# Altium PCB PCB1.PcbDoc
Units mm, origin at the board's own origin, x right, y up, seen from the top; angles counter-clockwise.
Board outline 30 x 50 mm, 2 copper layers (Top Layer, Bottom Layer); 27 components, 43 nets, 126 pads, 106 vias.
Unrouted connection lines stored in the file: 2.
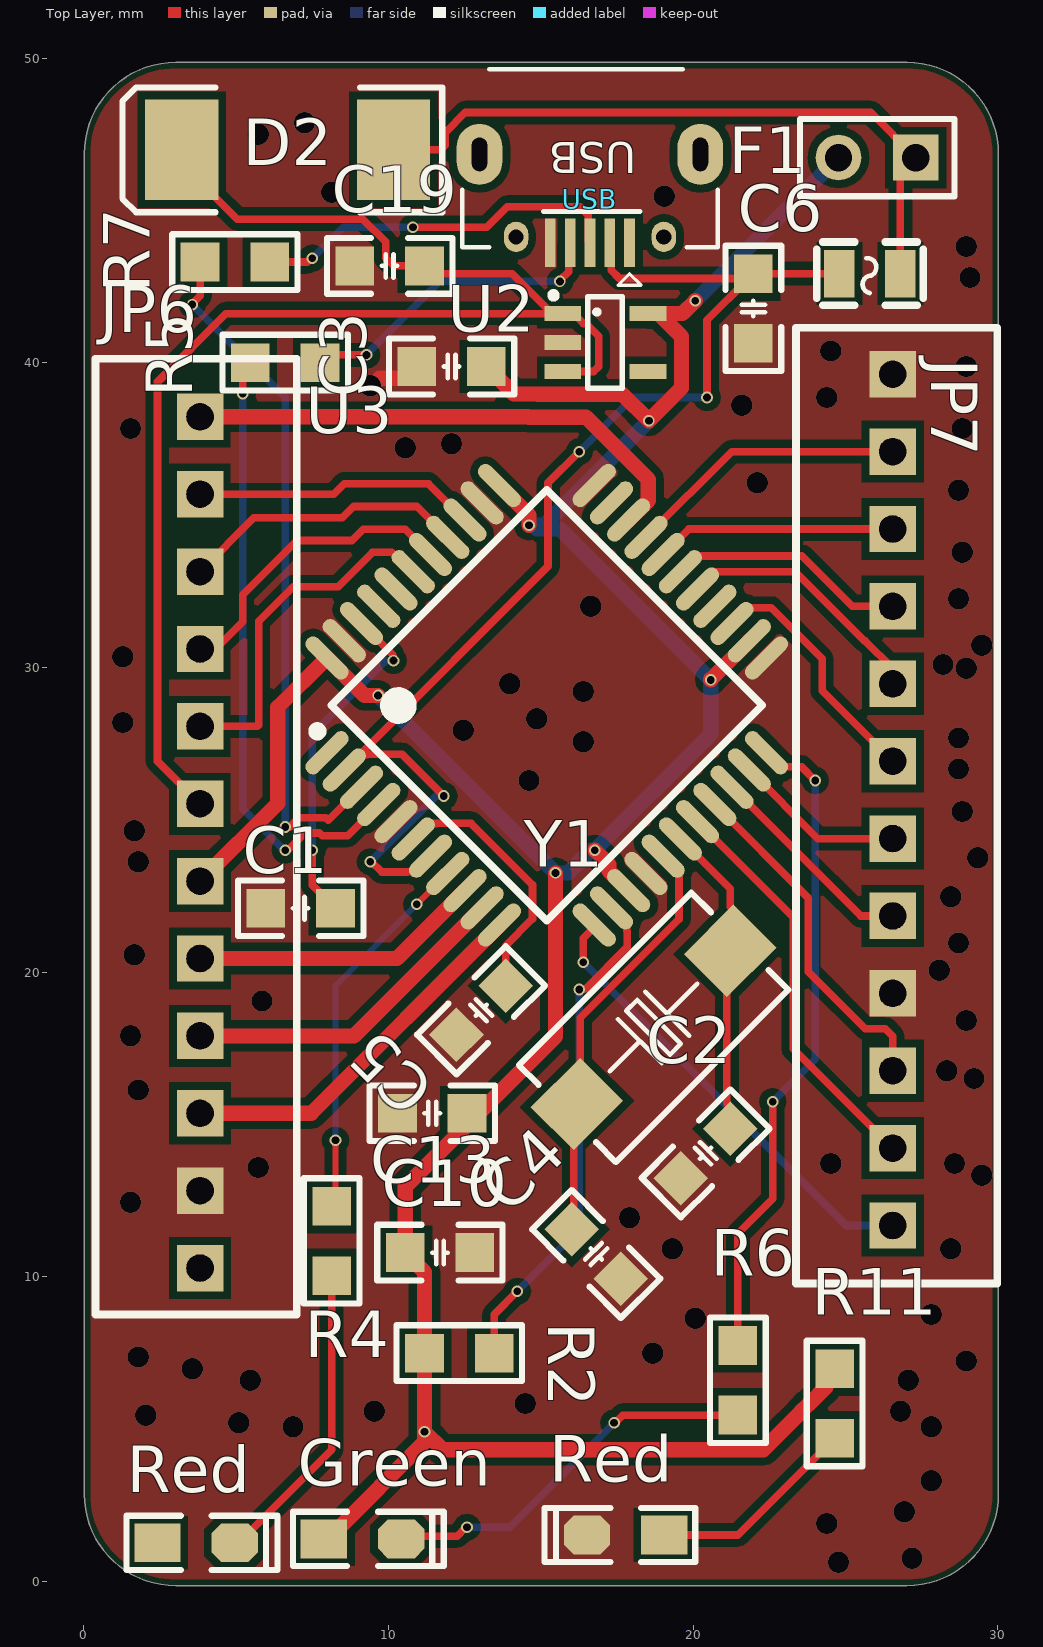
[diagram p0: Top Layer view]
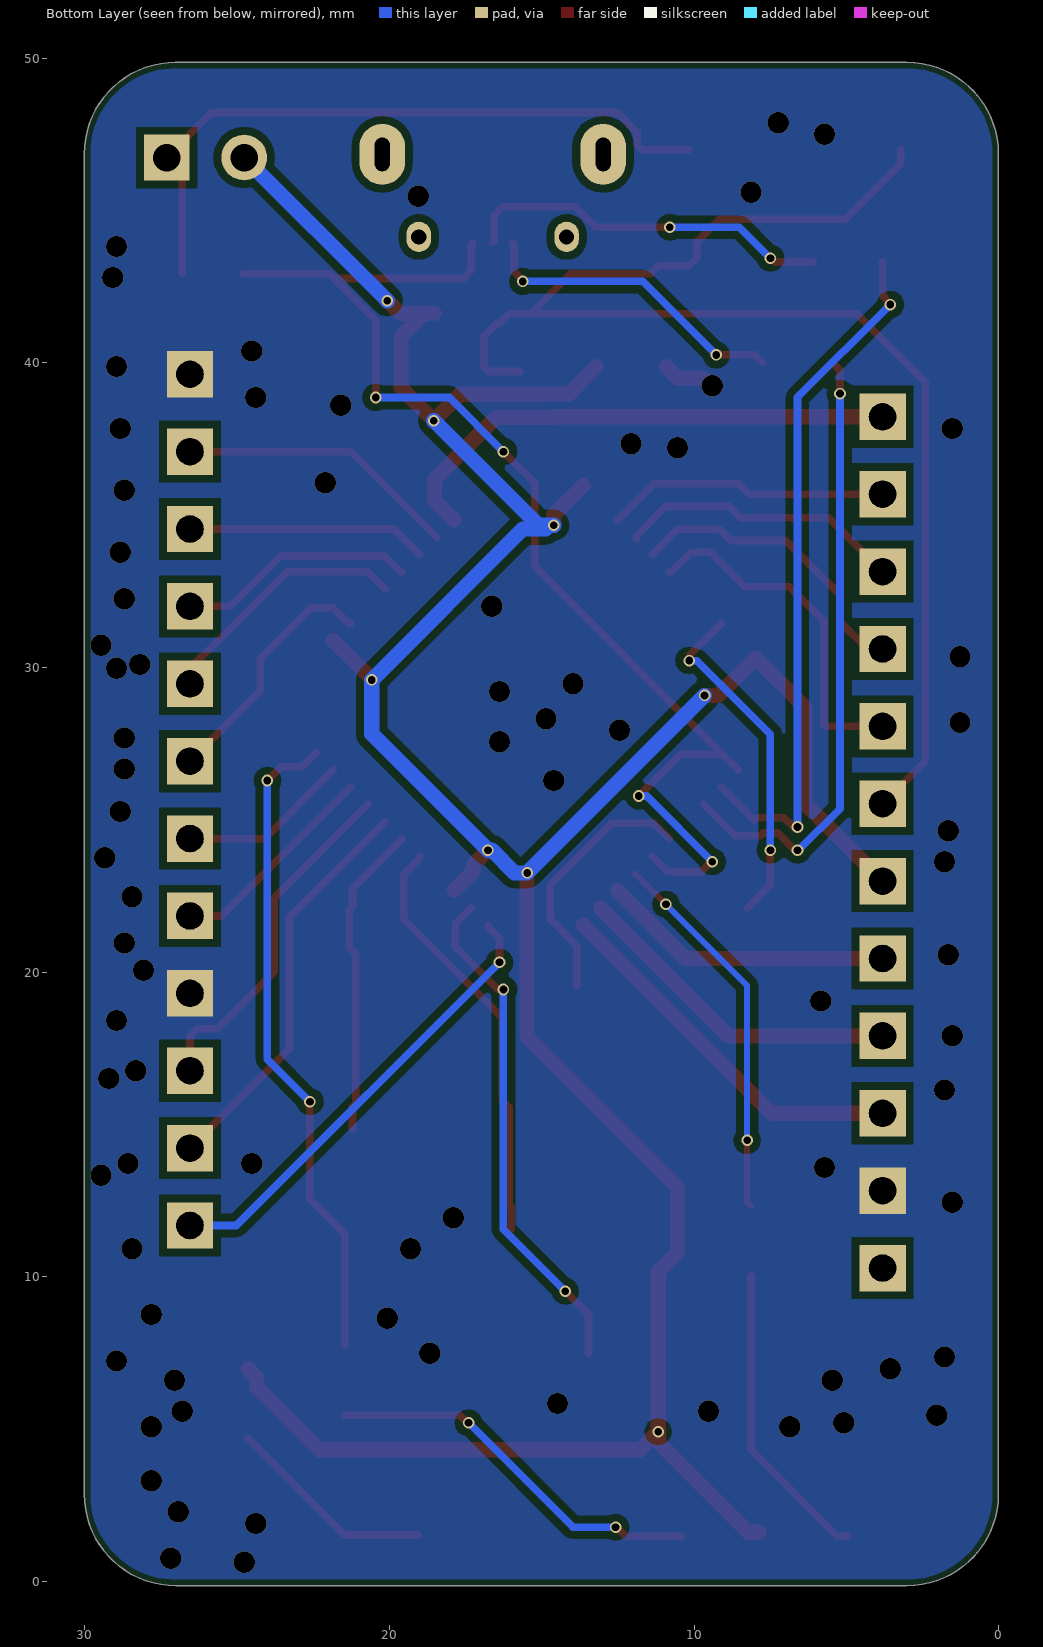
[diagram p1: Bottom Layer view, seen from below]
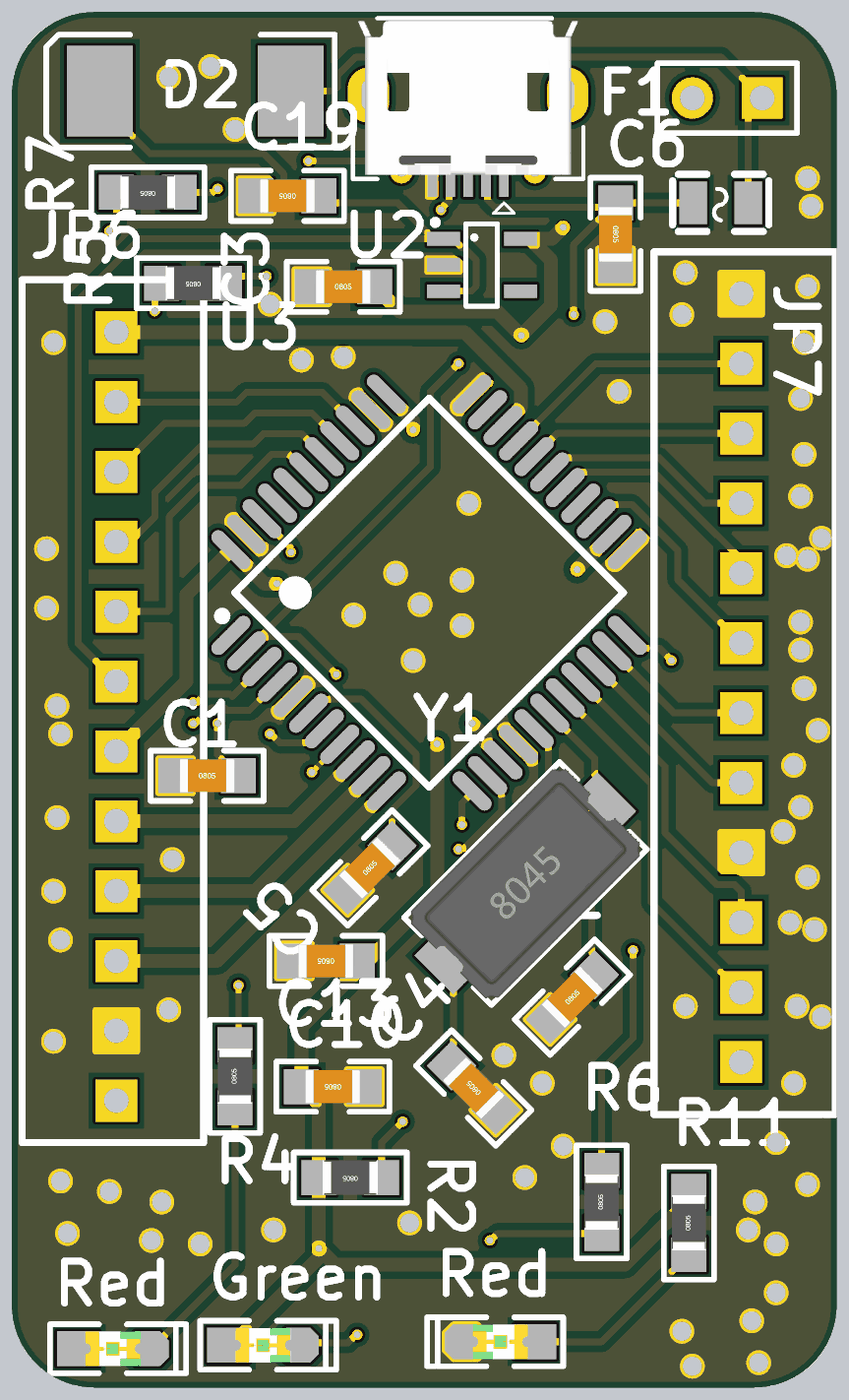
[diagram p2: 3D render of the assembled board from above, using the file's embedded part models]

## Layer stack, top to bottom
Top Solder: solder mask 0.0102, Solder Resist, Dk 3.5
Top Layer: signal copper 0.0356
Dielectric 1: dielectric 0.32, FR-4, Dk 4.8
Bottom Layer: signal copper 0.0356
Bottom Solder: solder mask 0.0102, Solder Resist, Dk 3.5

## Board outline
0.011,2.862 ccw(c3.011,2.862) 3.011,-0.138 27.011,-0.138 ccw(c27.011,2.862) 30.011,2.862 30.011,46.862 ccw(c27.011,46.862) 27.011,49.862 3.011,49.862 ccw(c3.011,46.862) 0.011,46.862

## Design rules (kind name [scope] priority, off if disabled: settings)
BoardOutlineClearance BoardOutlineClearance_1 [InNet('GND')] p1: gap=0.2 ignorepadtopadclearanceinfootprint=FALSE
BoardOutlineClearance [All] p2: gap=1.5 ignorepadtopadclearanceinfootprint=FALSE
Clearance Clearance_4 [HasPad( 'Free-1' )] p1: gap=1.5 ignorepadtopadclearanceinfootprint=FALSE
Clearance Clearance_3 [HasPad( 'Free-2' )] p2: gap=1.5 ignorepadtopadclearanceinfootprint=FALSE
Clearance Clearance_2 [HasFootprint( 'QFN24' )] p3: gap=0.2 ignorepadtopadclearanceinfootprint=FALSE
Clearance Clearance_1 [HasFootprint( 'TQFP64-10*10' )] p4: gap=0.2 ignorepadtopadclearanceinfootprint=FALSE
Clearance [All] p5: gap=0.25 ignorepadtopadclearanceinfootprint=FALSE
ComponentClearance [All] p1: gap=0 collisioncheckmode=3 verticalgap=0 showdistances=FALSE
PlaneClearance [All] p1: clearance=0.254
PlaneConnect [All] p1: planeconnectstyle=Direct reliefexpansion=0.508 reliefentries=4 reliefconductorwidth=0.254 reliefairgap=0.254
PolygonConnect [All] p1: connectstyle=Direct reliefconductorwidth=0.254 reliefentries=4 polygonreliefangle="90 Angle" airgapwidth=0.254
RoutingVias [All] p1: holewidth=0.254 width=0.381 viastyle="Through Hole" minholewidth=0.178 minwidth=0.254 maxholewidth=0.8 maxwidth=1.5
SilkToSilkClearance [All] p1: silktosilkclearance=0
SilkToSolderMaskClearance [IsPad] p1: minsilkscreentomaskgap=0 clearancetoexposedcopper=TRUE
SolderMaskExpansion [All] p1: expansion=0.102
Width [All] p1: maxlimit=8 minlimit=0.2 preferedwidth=0.25
25 further rules are at their usual default settings.

## Classes and differential pairs
component class Lesson3_SCH: C1 C2 C3 C4 C5 C6 C10 C13 C19 D2 F1 Green JP6 JP7 R2 R4 R5 R6 R7 R11 Red U3 Y1

## Components (designator, comment, footprint, x,y, rotation, side; value= is the part's Value field where it differs from the comment)
C1 "Cap" C0805_M 7.112,22.098 r0 top value=0.1uF
C2 "Cap" C0805_M 20.401,14.051 r45 top value=22pF
C3 "Cap" C0805_M 12.065,39.878 r0 top value=100pF
C4 "Cap" C0805_M 16.81,10.749 r135 top value=22pF
C5 "Cap" C0805_M 13.035,18.75 r45 top value=1uF
C6 "Cap" C0805_M 21.971,41.783 r270 top value=1uF
C10 "Cap" C0805_M 11.684,10.795 r180 top value=100pF
C13 "Cap Pol1" C0805_M 11.43,15.367 r180 top value=100pF
C19 "Cap Pol1" C0805_M 10.033,43.18 r180 top value=100pF
D2 "Diode" SMC 6.685,46.99 r180 top
F1 "500mA" F 27.575,43.942 r0 top
Green "D3" "LED 0805G" 9.144,1.397 r0 top
JP6 "" JP7 0.381,12.192 r0 top
JP7 "" JP7 29.972,37.719 r180 top
R2 "Res1" "R 0805_M" 12.319,7.493 r180 top value=10K
R4 "Res1" "R 0805_M" 8.128,11.176 r90 top value=330
R5 "Res1" "R 0805_M" 6.604,40.005 r180 top value=22
R6 "Res1" "R 0805_M" 21.463,6.604 r90 top value=330
R7 "Res1" "R 0805_M" 4.953,43.307 r180 top value=22
R11 "Res1" "R 0805_M" 24.638,5.842 r90 top value=1K
Red "LED1" "LED 0805R" 17.78,1.524 r180 top
Red "D1" "LED 0805R" 3.683,1.27 r0 top
U2 "MIC5219" MIC5219 17.653,42.164 r270 top
U3 "ATMEGA32U34" ATMEGA32U4 8.186,28.773 r45 top
USB "USB" PCBComponent_1 12.416,43.794 r180 top
Y1 "XTAL" "OSC 8045-2P" 18.695,18.187 r45 top
? "SJ1" HDR1X2 27.305,46.736 r180 top

## Footprints (in the part's own frame and the unit in brackets; to place one, negate y for a bottom-side part, rotate by r counter-clockwise, add the part's x,y. Pads: shape width x height; smd on the part's side, far side on the other; paste and mask are expansions set on the pad)
ATMEGA32U4 [mm]
  oval 1.8x0.5 smd: 1(-1.259,-0.965) 2(-1.259,-1.765) 3(-1.259,-2.565) 4(-1.259,-3.365) 5(-1.259,-4.165) 6(-1.259,-4.965) 7(-1.259,-5.765) 8(-1.259,-6.565) 9(-1.259,-7.365) 10(-1.259,-8.165) 11(-1.259,-8.965) 23(11.141,-8.965) 24(11.141,-8.165) 25(11.141,-7.365) 26(11.141,-6.565) 27(11.141,-5.765) 28(11.141,-4.965) 29(11.141,-4.165) 30(11.141,-3.365) 31(11.141,-2.565) 32(11.141,-1.765) 33(11.141,-0.965)
  oval 0.5x1.8 smd: 12(0.941,-11.165) 13(1.741,-11.165) 14(2.541,-11.165) 15(3.341,-11.165) 16(4.141,-11.165) 17(4.941,-11.165) 18(5.741,-11.165) 19(6.541,-11.165) 20(7.341,-11.165) 21(8.141,-11.165) 22(8.941,-11.165) 34(8.941,1.235) 35(8.141,1.235) 36(7.341,1.235) 37(6.541,1.235) 38(5.741,1.235) 39(4.941,1.235) 40(4.141,1.235) 41(3.341,1.235) 42(2.541,1.235) 43(1.741,1.235) 44(0.941,1.235)
  silkscreen extent -1.13,-9.97 9.94,0.04
C0805_M [mil] "无极性贴片电容"
  rect 50x50 smd: 1(-45,0) 2(45,0)
  silkscreen extent -81,-36 81,36, body extent -39,-24 39,24, height 22
F [mm]
  rect 1x1.55 smd: 1(-2.778,-1.016) 2(-0.778,-1.016)
  silkscreen extent -3.53,-2.06 -0.03,0.02
HDR1X2 [mm] "Connector; Header; 2 Position"
  rect 1.5x1.5 hole 0.9: 1(0,0)
  round 1.5 hole 0.9: 2(2.54,0)
  silkscreen extent -1.27,-1.27 3.81,1.27
JP7 [mil]
  rect 60x60 hole 35 slot 35.2 at 0 deg: 1(135,-75) 2(135,25) 3(135,125) 4(135,225) 5(135,325) 6(135,425) 7(135,525) 8(135,625) 9(135,725) 10(135,825) 11(135,925) 12(135,1025)
  silkscreen extent 0,-135 260,1100
"LED 0805G" [mil] "绿色0805LED                              淘宝ID:黄晶宝石"
  rect 60x50 smd: 1(-50,0)
  oct 60x50 smd: 2(50,0)
  silkscreen extent -90,-35 105,35, body extent -39,-25 39,25, height 32
"LED 0805R" [mil] "红色0805LED                                       淘宝ID:黄晶宝石"
  rect 60x50 smd: 1(-50,0)
  oct 60x50 smd: 2(50,0)
  silkscreen extent -90,-35 105,35, body extent -39,-25 39,25, height 32
MIC5219 [mm]
  rect 0.5x1.2 smd: 1(0.549,-1.94) 2(1.499,-1.94) 3(2.449,-1.94) 4(2.449,0.86) 5(0.549,0.86)
  silkscreen extent -0.13,-2.32 3,0.02
"OSC 8045-2P" [mm] "8mm*4.5mm*1.8mm(长*宽*高)"
  rect 2.3x2 smd: 1(-3.556,0) 2(3.556,0)
  silkscreen extent -4,-2.25 4,2.25, body extent -4,-2.25 4,2.25, height 1.85
PCBComponent_1 [mm]
  oval 1.5x2 hole 0.5 slot 1.1 at 90 deg: 5(-7.816,-3.048) 5(-0.566,-3.048)
  oval 0.8x1 hole 0.5: 5(-6.616,-0.338) 5(-1.766,-0.338)
  rect 0.35x1.6 smd: P1(-5.491,-0.148) P2(-4.841,-0.148) P3(-4.191,-0.148) P4(-3.541,-0.148) P5(-2.891,-0.148)
  silkscreen extent -8.38,-5.84 0,1.25, body extent -8.19,-5.76 -0.19,-0.16, height 2.8
"R 0805_M" [mil] "1/8W贴片电阻"
  rect 50x50 smd: 1(-45,0) 2(45,0)
  silkscreen extent -81,-36 81,36, body extent -39,-25 39,25, height 20
SMC [mm] "DO-214-AB/SMC; 2 C-Bend Leads; Body 7.9 x 5.9 mm, inc. leads (LxW)"
  rect 2.4x3.3 smd: 1(-3.475,0) 2(3.475,0)
  silkscreen extent -5.07,-2.05 5.43,2.05

## Part data
C1 C2 C3 C4 C5 C6 C10: "Capacitor", LatestRevisionDate=17-Jul-2002, LatestRevisionNote="Re-released for DXP Platform.", PackageDescription="Radial Cap, Thru-Hole; 2 Leads; 0.3 in Pin Spacing", PackageReference=RAD-0.3, Published=8-Jun-2000, Publisher="Altium Limited"
C13 C19: "Polarized Capacitor (Radial)", LatestRevisionDate=17-Jul-2002, LatestRevisionNote="Re-released for DXP Platform.", PackageDescription="Polarized Capacitor (Radial); 2 Leads", PackageReference=RB7.6-15, Published=8-Jun-2000, Publisher="Altium Limited"
D2: "Default Diode", Code_JEDEC=DO-214-AB, LatestRevisionDate=17-Jul-2002, LatestRevisionNote="Re-released for DXP Platform.", PackageDescription="DO-214-AB/SMC; 2 C-Bend Leads; Body 7.9 x 5.9 mm, inc. leads (LxW)", PackageReference=SMC, PackageVersion=Sep-1996, Published=8-Jun-2000, Publisher="Altium Limited"
F1: library part "Fuse 1", "Fuse", LatestRevisionDate=17-Jul-2002, LatestRevisionNote="Re-released for DXP Platform.", PackageDescription="Thru-Hole; 2 Leads", PackageReference=PIN-W2/E2.8, Published=8-Jun-2000, Publisher="Altium Limited"
Green Red Red: library part LED0, "Typical INFRARED GaAs LED", LatestRevisionDate=08-Jul-2005, LatestRevisionNote="Mech Layer 1 removed.", PackageDescription="LED; 2 Leads", PackageReference=LED-0, Published=8-Jun-2000, Publisher="Altium Limited"
JP6 JP7: library part JP？
R2 R4 R5 R6 R7 R11: "Resistor", LatestRevisionDate=17-Jul-2002, LatestRevisionNote="Re-released for DXP Platform.", PackageDescription="Axial Device, Thru-Hole; 2 Leads; 0.3 in Pin Spacing", PackageReference=AXIAL-0.3, Published=8-Jun-2000, Publisher="Altium Limited"
Y1: "Crystal Oscillator", LatestRevisionDate=17-Jul-2002, LatestRevisionNote="Re-released for DXP Platform.", PackageDescription="Crystal, Thru-Hole; 2 Leads; Body 3.1 x 8.2 mm (Dia.xH)", PackageReference=R38, Published=8-Jun-2000, Publisher="Altium Limited"

## Via types
v1: diameter 0.7, hole 0.7, Top Layer to Bottom Layer, 75 vias
v2: diameter 0.381, hole 0.254, Top Layer to Bottom Layer, 31 vias

## Nets (pads, with @x,y where several pads share a name; then routed paths per layer and width w, separated by ;. In a path a pad name is that pad's centre, name@x,y a point inside that pad or via, vN(x,y) a via of type N, cw(c..) or ccw(c..) an arc to the next point about the centre after c; other vN are vias at no path point)
A0: JP6.11 U3.36 | length 9.3
  Top Layer w0.25: JP6.11 8.191,35.687 8.539,36.034 11.307,36.034 U3.36
A1: JP6.10 U3.37 | length 9.5
  Top Layer w0.25: JP6.10 5.579,34.916 8.481,34.916 8.849,35.284 10.926,35.284 11.884,34.326 U3.37@11.884,34.217
A2: JP6.9 U3.38 | length 10.1
  Top Layer w0.25: JP6.9 4.318,30.607 5.208,31.497 5.208,32.386 6.985,34.163 6.985,34.166 8.792,34.166 9.16,34.534 10.544,34.534 U3.38
A3: JP6.8 U3.39 | length 11.6
  Top Layer w0.25: JP6.8 5.688,28.067 5.733,28.113 5.733,31.514 6.872,32.653 8.339,32.653 9.471,33.784 10.095,33.784 10.739,33.14 U3.39
A4: U3.40
A5: U3.41
AREF: C1.2 U3.42 | length 11.3
  Top Layer w0.25: v2(7.493,24.003) 7.493,22.86 C1.2 ; U3.42 10.135,30.418 10.135,30.251 v2(10.16,30.226)
  Bottom Layer w0.25: v2(7.493,24.003) 7.493,27.808 9.911,30.226 v2(10.16,30.226)
D2: JP7.10 U3.19 | length 11.5
  Top Layer w0.25: U3.19 23.777,22.433 23.777,20.016 25.649,18.144 26.3,18.144 26.543,17.901 JP7.10
D3: JP7.11 U3.18 | length 13.4
  Top Layer w0.25: U3.18 23.277,21.802 23.277,17.49 JP7.11
D4: JP7.6 U3.25 | length 8.2
  Top Layer w0.25: U3.25 21.34,31.443 21.859,31.962 22.556,31.962 24.231,30.287 24.231,29.236 JP7.6
D5: JP6.12 U3.31 | length 17.2
  Top Layer w0.5: JP6.12 13.798,38.227 14.584,38.227 14.595,38.215 16.48,38.215 18.522,36.173 18.522,35.482 U3.31
D6: JP7.5 U3.27 | length 8.5
  Top Layer w0.25: U3.27 20.713,33.147 23.346,33.147 25.626,30.867 25.648,30.867 26.543,29.972 JP7.5
D7: JP7.12 U3.12 | length 15.1
  Top Layer w0.25: v2(16.383,20.32) 16.383,21.117 16.746,21.481 U3.12
  Bottom Layer w0.25: v2(16.383,20.32) 25.019,11.684 JP7.12
D8: JP7.4 U3.28 | length 7.9
  Top Layer w0.25: U3.28 19.642,33.14 20.161,33.659 23.563,33.659 25.218,32.004 JP7.4
D9: JP7.3 U3.29 | length 7.9
  Top Layer w0.25: U3.29 19.847,34.544 JP7.3
D10: JP7.2 U3.30 | length 9.3
  Top Layer w0.25: U3.30 21.256,37.084 JP7.2
D11: U3.1
D12: U3.26
D13: U3.32
D17: R4.2 U3.8 | length 12.5
  Top Layer w0.2: R4.2 8.255,12.446 v2(8.255,14.478) ; v2(10.922,22.225) U3.8
  Bottom Layer w0.2: v2(8.255,14.478) 8.255,19.558 v2(10.922,22.225)
D+: R5.2 U3.4 | length 20.5
  Top Layer w0.25: v2(5.207,38.989) 5.207,39.751 R5.2 ; v2(6.604,24.003) 6.629,24.028 6.718,24.028 7.259,24.569 7.727,24.569 7.814,24.481 8.653,24.481 U3.4
  Bottom Layer w0.25: v2(5.207,38.989) 5.207,25.362 6.541,24.028 6.579,24.028 v2(6.604,24.003)
D-: R7.2 U3.3 | length 23
  Top Layer w0.25: v2(3.556,41.91) 3.556,41.945 3.81,42.199 R7.2 ; v2(6.604,24.765) 6.748,24.765 7.052,25.068 7.934,25.068 8.021,24.981 U3.3
  Bottom Layer w0.25: v2(3.556,41.91) 6.604,38.862 v2(6.604,24.765)
GND: C1.1 C2.1 C3.1 C4.1 C5.1 C6.2 C10.1 C13.2 C19.2 JP6.2 JP7.1 JP7.9 Red.2@16.51,1.524 U2.2 U3.5 U3.15 U3.23 U3.33 U3.35 U3.43 USB.P5 | length 1.8
  Top Layer w0.5: v1(9.398,39.243) 9.452,39.243 9.702,39.493 10.537,39.493 C3.1
  other v1: 24.765,0.635 27.178,0.762 24.384,1.905 26.924,2.286 27.813,3.302 6.858,5.08 27.813,5.08 5.08,5.207 2.032,5.461 9.525,5.588 26.797,5.588 14.478,5.842 5.461,6.604 27.051,6.604 3.556,6.985 28.956,7.239 1.778,7.366 18.669,7.493 20.066,8.636 27.813,8.763 19.304,10.922 28.448,10.922 17.907,11.938 1.524,12.446 29.464,13.335 5.715,13.589 24.511,13.716 28.575,13.716 1.778,16.129 29.21,16.51 28.321,16.764 1.524,17.907 28.956,18.415 5.842,19.05 28.067,20.066 1.651,20.574 28.702,20.955 28.448,22.479 1.778,23.622 29.337,23.749 1.651,24.638 28.829,25.273 14.605,26.289 28.702,26.67 16.383,27.559 28.702,27.686 12.446,27.94 1.27,28.194 14.859,28.321 16.383,29.21 13.97,29.464 28.956,29.972 28.194,30.099 1.27,30.353 29.464,30.734 16.637,32.004 28.702,32.258 28.829,33.782 28.702,35.814 22.098,36.068 10.541,37.211 12.065,37.338 1.524,37.846 28.829,37.846 21.59,38.608 24.384,38.862 28.956,39.878 24.511,40.386 29.083,42.799 28.956,43.815 19.05,45.466 8.128,45.593 5.715,47.498 7.239,47.879
MISO: JP6.3 U3.11 | length 12.4
  Top Layer w0.5: JP6.3 7.458,15.367 U3.11
MOSI: JP6.4 U3.10 | length 11
  Top Layer w0.5: JP6.4 8.867,17.907 U3.10
Net_1: ?.1 D2.1 F1.2 | length 22.5
  Top Layer w0.25: D2.1 11.711,46.99 11.857,47.136 11.857,47.558 12.516,48.217 25.824,48.217 ?.1 26.797,46.228 F1.2
NetC2_2: C2.2 U3.17 Y1.2 | length 10.4
  Top Layer w0.25: U3.17 21.209,22.738 21.209,22.151 21.315,22.045 21.315,20.807 Y1.2 21.103,20.595 21.103,15.686 21.209,15.58 C2.2
NetC4_2: C4.2 U3.16 Y1.1 | length 13.9
  Top Layer w0.25: C4.2 16.002,12.278 16.074,12.35 16.074,15.566 Y1.1 16.286,15.778 16.286,18.497 19.528,21.739 19.528,23.22 19.009,23.739 U3.16
NetC5_2: C5.2 U3.6 | length 8.6
  Top Layer w0.25: U3.6 11.314,24.88 11.562,24.88 11.573,24.891 12.701,24.891 14.72,22.872 14.72,21.745 13.843,20.868 C5.2
NetGreen_2: Green.2 R6.1 | length 12.7
  Top Layer w0.25: Green.2@10.414,1.487 12.247,1.487 12.538,1.778 v2(12.573,1.778) ; v2(17.399,5.207) 17.434,5.207 17.688,5.461 R6.1
  Bottom Layer w0.25: v2(12.573,1.778) 13.97,1.778 v2(17.399,5.207)
NetR2_1: R2.1 U3.13 | length 16.7
  Top Layer w0.25: R2.1 13.462,8.763 v2(14.224,9.525) ; v2(16.256,19.431) 16.281,19.456 16.462,19.456 17.831,20.825 17.831,21.343 17.82,21.355 17.82,21.602 U3.13
  Bottom Layer w0.25: v2(14.224,9.525) 16.256,11.557 v2(16.256,19.431)
NetR4_1: R4.1 Red.2@4.953,1.27 | length 10.1
  Top Layer w0.25: Red.2@4.953,1.487 5.297,1.487 8.128,4.318 R4.1
NetR5_1: R5.1 USB.P4 | length 10.4
  Top Layer w0.25: R5.1 8.001,40.259 v2(9.271,40.259) ; v2(15.621,42.672) 15.621,42.707 15.907,42.993 15.907,43.892 USB.P4
  Bottom Layer w0.25: v2(9.271,40.259) 11.684,42.672 v2(15.621,42.672)
NetR6_2: R6.2 U3.22 | length 21.6
  Top Layer w0.25: R6.2 21.463,11.413 22.606,12.556 v2(22.606,15.748) ; U3.22 22.863,26.741 23.551,26.741 v2(24.003,26.289)
  Bottom Layer w0.25: v2(22.606,15.748) 24.003,17.145 v2(24.003,26.289)
NetR7_1: R7.1 USB.P3 | length 12.2
  Top Layer w0.25: R7.1 7.331,43.307 7.458,43.434 v2(7.493,43.434) ; v2(10.795,44.45) 13.225,44.45 13.892,45.117 16.287,45.117 16.557,44.847 16.557,43.992 USB.P3
  Bottom Layer w0.25: v2(7.493,43.434) 8.509,44.45 v2(10.795,44.45)
NetR11_1: R11.1 Red.1@19.05,1.524 | length 6.9
  Top Layer w0.25: Red.1@19.05,1.524 21.463,1.524 R11.1
RAW: C19.1 D2.2 JP6.7 U2.1 U2.3 | length 47.3
  Top Layer w0.25: D2.2 3.21,46.54 5.032,44.718 9.153,44.718 9.9,43.97 9.9,43.446 10.166,43.18 C19.1 11.43,42.926 14.052,42.926 U2.1@15.363,41.615 ; JP6.7 2.413,26.924 2.413,39.37 4.658,41.615 U2.1@15.363,41.615 ; U2.3 16.728,39.715 16.891,39.878 16.891,40.868 16.468,41.29 16.388,41.29 16.063,41.615 U2.1 U2.1@15.363,41.615
RESET: JP6.1
RXI: JP7.8 U3.20 | length 7
  Top Layer w0.25: U3.20 25.497,21.844 JP7.8
SCK: JP6.5 U3.9 | length 9.6
  Top Layer w0.5: JP6.5 10.276,20.447 U3.9
TXO: JP7.7 U3.21 | length 5.6
  Top Layer w0.25: U3.21 24.088,24.384 JP7.7
UVCC: C6.1 F1.1 U3.2 U3.7 USB.P2 | length 40.6
  Top Layer w0.25: U3.2 U3.2@9.051,27.142 ; v2(9.398,23.622) 9.433,23.622 9.768,23.288 10.606,23.288 10.617,23.299 10.865,23.299 U3.7 ; v2(11.811,25.781) 10.438,27.154 9.31,27.154 9.299,27.142 U3.2@9.051,27.142 ; v2(16.256,37.084) 15.23,36.058 15.23,33.321 U3.2@9.051,27.142 ; USB.P2 17.307,43.892 17.307,43.037 17.577,42.767 C6.1@21.812,42.767 ; v2(20.447,38.862) 20.447,41.402 C6.1@21.812,42.767 ; F1.1 C6.1 C6.1@21.812,42.767
  Bottom Layer w0.25: v2(9.398,23.622) 11.557,25.781 v2(11.811,25.781) ; v2(16.256,37.084) 18.034,38.862 v2(20.447,38.862)
VCC: ?.2 C3.2 C10.2 C13.1 Green.1 JP6.6 R2.2 R11.2 Red.1@2.413,1.27 U2.5 U3.14 U3.24 U3.34 U3.44 | length 105.9
  Top Layer w0.5: JP6.6 6.36,25.537 6.36,28.694 U3.44 9.207,29.083 v2(9.652,29.083) ; Green.1@7.874,1.612 8.216,1.612 11.176,4.572 v2(11.176,4.914) ; C3.2 14.109,38.977 14.894,38.977 14.906,38.965 17.677,38.965 v2(18.542,38.1) 19.613,39.171 19.613,40.865 U2.5@18.863,41.615 ; U3.34 14.605,34.999 v2(14.605,34.671) ; v2(15.477,23.258) 15.477,17.89 10.541,12.954 C10.2 11.176,10.16 R2.2 v2(11.176,4.914) ; v2(16.764,24.003) 17.234,23.533 17.234,23.319 U3.14 ; U2.5 U2.5@18.863,41.615 ; v2(20.066,42.037) 19.644,41.615 U2.5@18.863,41.615 ; v2(20.574,29.591) 20.574,29.614 U3.24 ; R11.2 24.357,6.704 24.357,6.377 23.813,5.834 23.796,5.834 23.503,5.541 23.503,5.524 22.305,4.326 11.764,4.326 v2(11.176,4.914)
  Bottom Layer w0.5: v2(9.652,29.083) v2(15.477,23.258) 15.892,23.258 16.637,24.003 v2(16.764,24.003) 20.574,27.813 v2(20.574,29.591) 15.621,34.544 14.859,34.544 ; v2(14.605,34.671) 15.113,34.671 v2(18.542,38.1) ; v2(20.066,42.037) ?.2
pads on no net: U2.4 USB.5 USB.P1

## Polygon pours and split planes (outlines as drawn)
GND on Top Layer "Top Layer-No Net" (solid, pour order 5): 0.011,2.862 ccw(c3.011,2.862) 3.011,-0.138 27.011,-0.138 ccw(c27.011,2.862) 30.011,2.862 30.011,46.862 ccw(c27.011,46.862) 27.011,49.862 3.011,49.862 ccw(c3.011,46.862) 0.011,46.862
GND on Bottom Layer "Top Layer-No Net1" (solid, pour order 6): 0.011,2.862 ccw(c3.011,2.862) 3.011,-0.138 27.011,-0.138 ccw(c27.011,2.862) 30.011,2.862 30.011,46.862 ccw(c27.011,46.862) 27.011,49.862 3.011,49.862 ccw(c3.011,46.862) 0.011,46.862

## Silkscreen, mask and mechanical layers (free items; w line width, h text height)
Mechanical 1:
  the board outline again, w0.254
Mechanical 15:
  lines w0.254: 3.175,-2.778 3.175,-0.778 ; 4.699,-2.286 3.175,-1.778 ; 4.699,-1.27 3.175,-1.778 ; 7.66,-1.778 3.175,-1.778 ; 23.201,-1.778 27.686,-1.778 ; 26.162,-2.286 27.686,-1.778 ; 26.162,-1.27 27.686,-1.778 ; 27.686,-2.778 27.686,-0.778 ; 29.861,1.405 31.861,1.389 ; 30.242,46.744 32.242,46.728 ; 30.366,2.925 30.861,1.397 ; 30.721,45.216 31.242,46.736 ; 30.985,16.17 30.861,1.397 ; 31.118,31.963 31.242,46.736 ; 31.382,2.917 30.861,1.397 ; 31.737,45.208 31.242,46.736
  text "45.341 (mm)" at 31.901,16.416 h1.52 r89.52
  text "24.511 (mm)" at 7.914,-2.692 h1.52